# Altium PCB LMS.PcbDoc
Units mm, origin at the board's own origin, x right, y up, seen from the top; angles counter-clockwise.
Board outline 38 x 48 mm, 2 copper layers (Top Layer, Bottom Layer); 29 components, 25 nets, 119 pads, 27 vias.
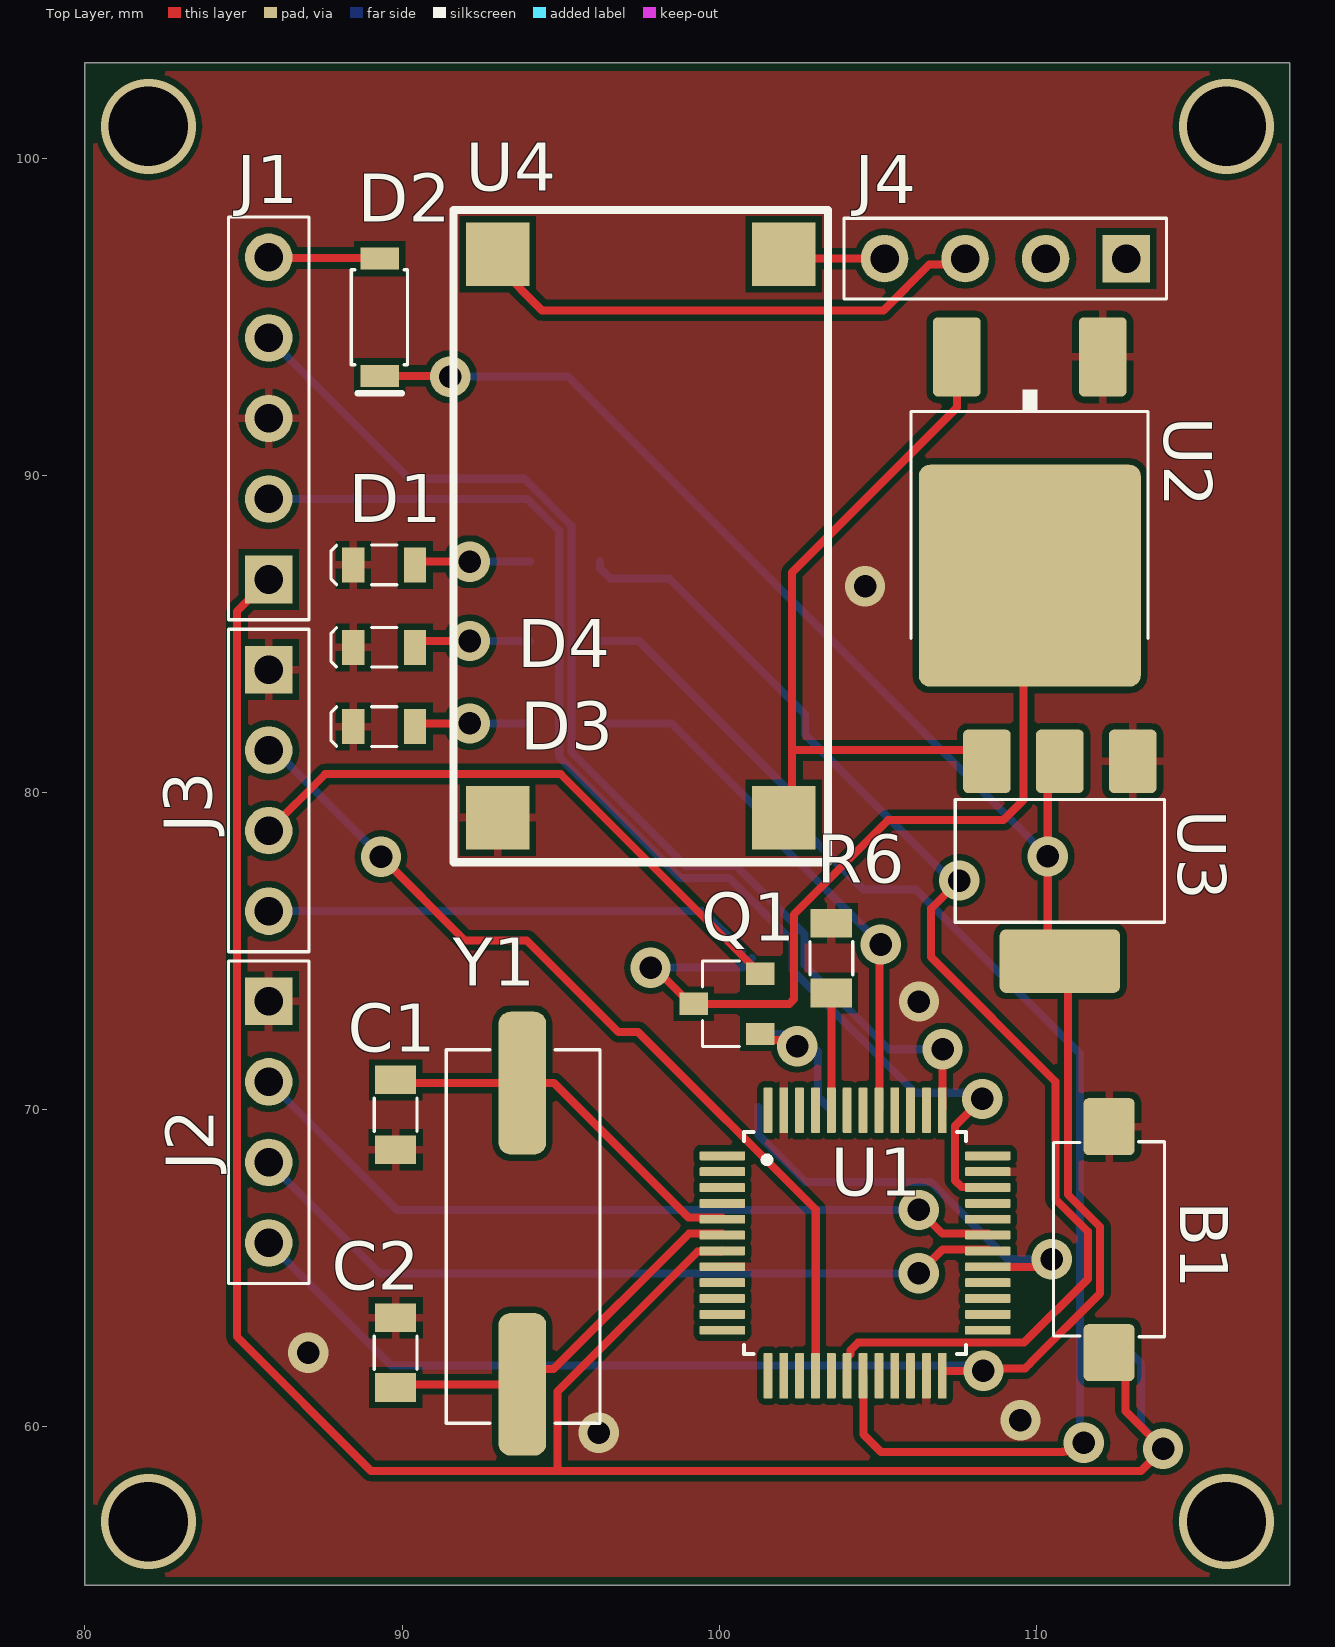
[diagram p0: Top Layer view]
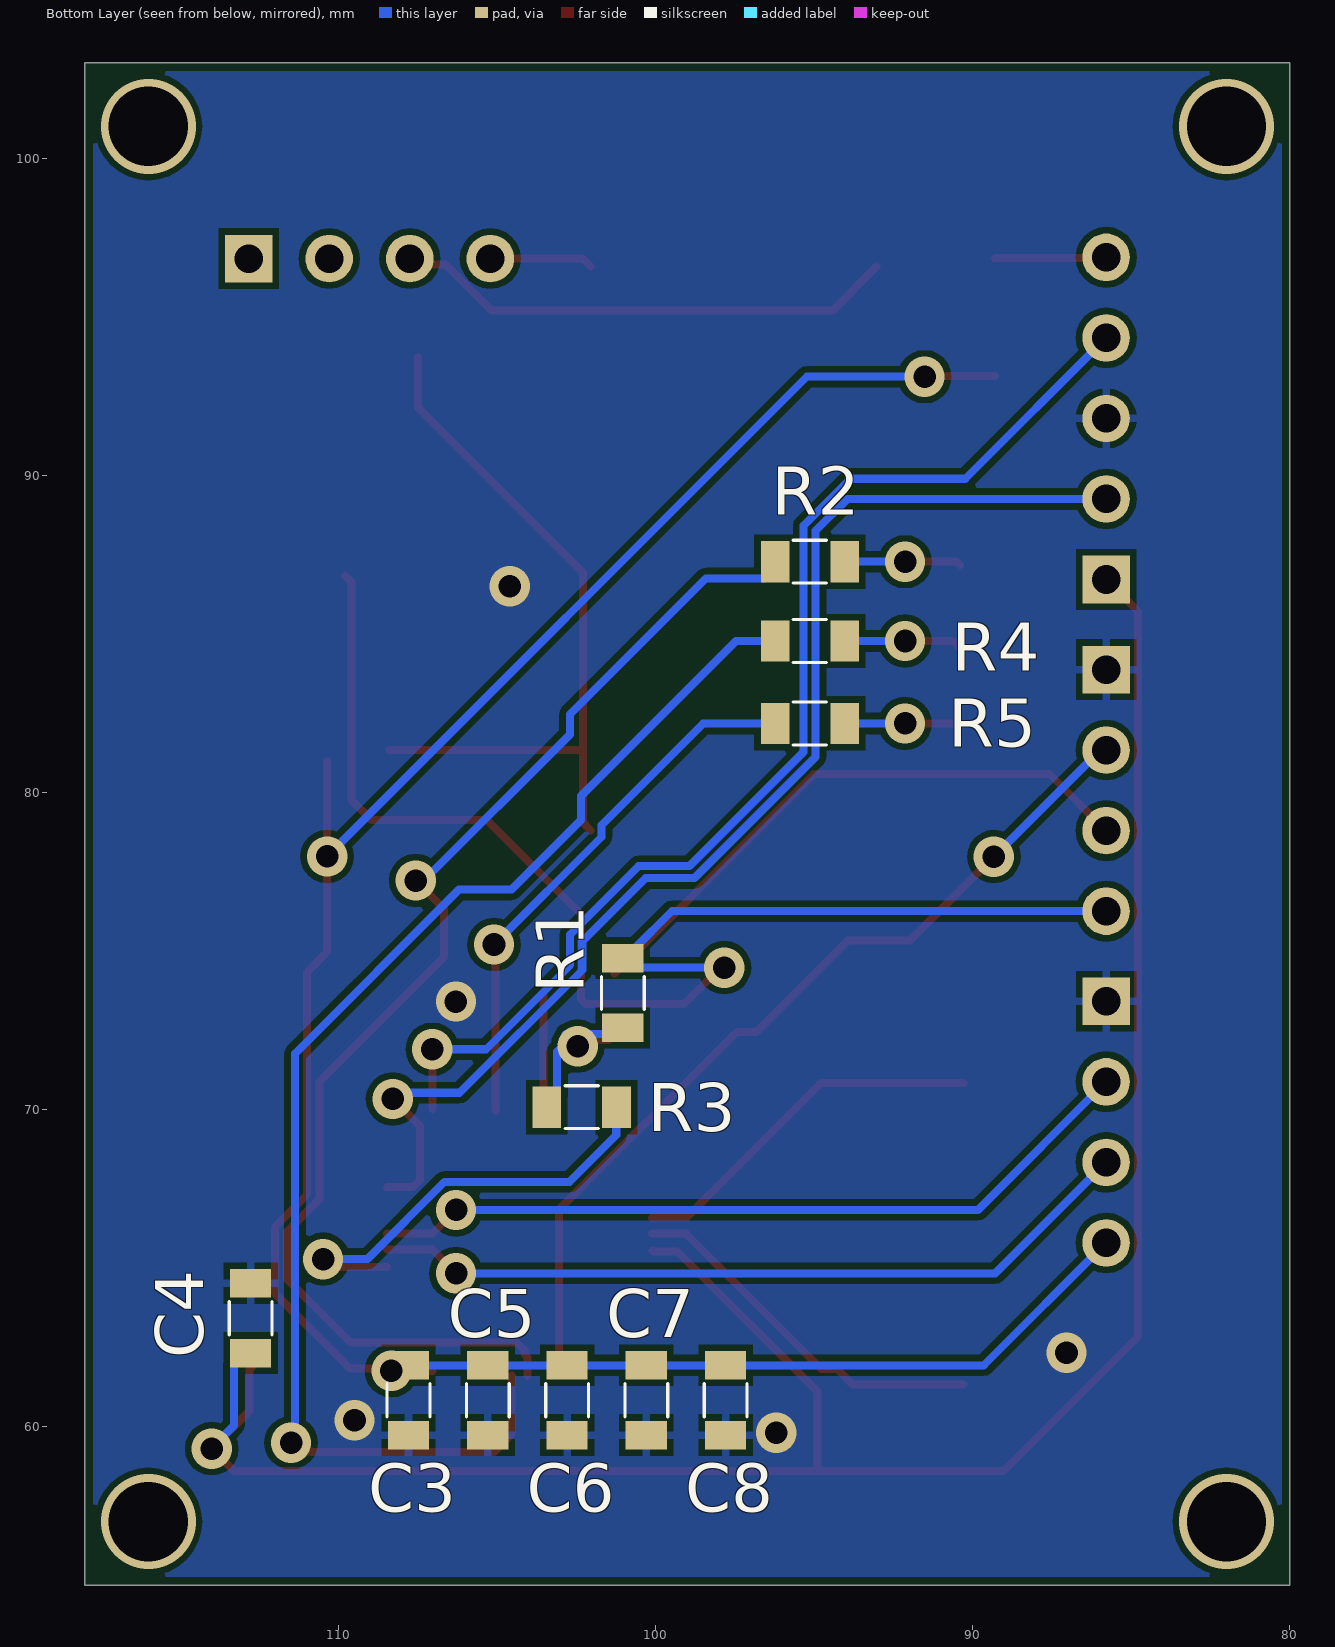
[diagram p1: Bottom Layer view, seen from below]
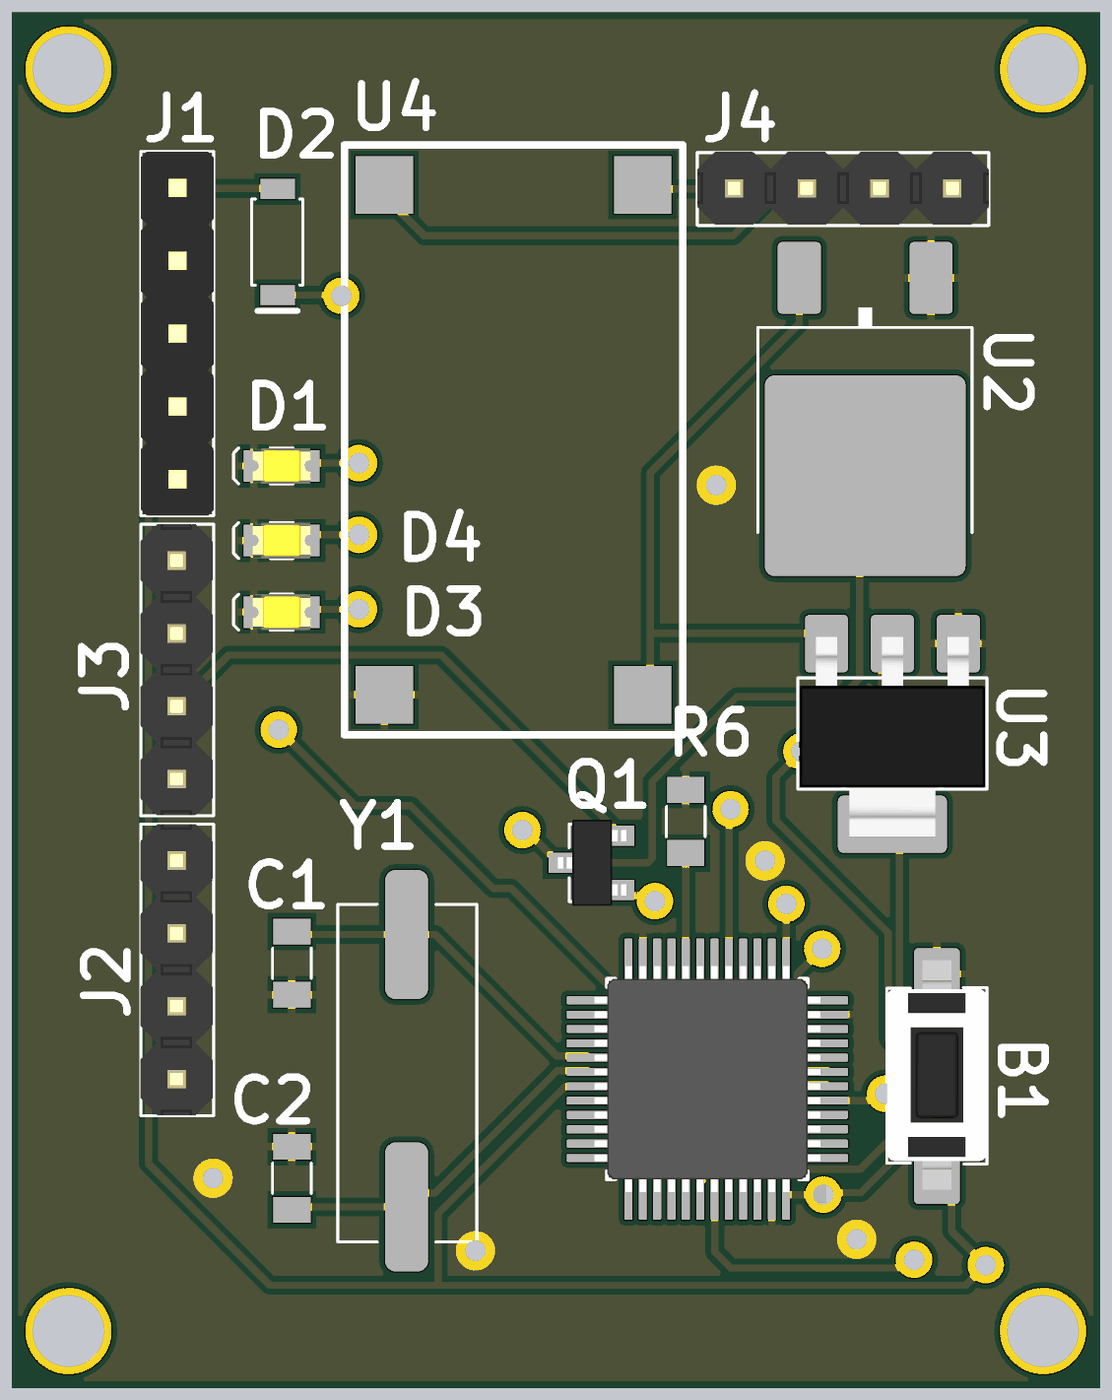
[diagram p2: 3D render of the assembled board from above, using the file's embedded part models]

## Layer stack, top to bottom
Top Solder: solder mask 0.0102, Solder Resist, Dk 3.5
Top Layer: signal copper 0.0356
Dielectric 1: dielectric 0.32, FR-4, Dk 4.8
Bottom Layer: signal copper 0.0356
Bottom Solder: solder mask 0.0102, Solder Resist, Dk 3.5

## Board outline
80,55 80,103 118,103 118,55

## Design rules (kind name [scope] priority, off if disabled: settings)
AcuteAngle [All] p1: minimum=3.50000000000000E+0001 checktracksonly=FALSE
BoardOutlineClearance "BoardOutlineClearance 1" [All] p1: gap=0.25 ignorepadtopadclearanceinfootprint=FALSE except(0: Arc-SplitContinuation Track-SplitContinuation SMDPad-SplitContinuation THPad-SplitContinuation Via-SplitContinuation Fill-SplitContinuation Poly-SplitContinuation Region-SplitContinuation Text-SplitContinuation) // Milling
Clearance "Clearance-1 1/2 Oz" [All] p1: gap=0.125 ignorepadtopadclearanceinfootprint=FALSE except(0.2: Arc-Fill Arc-Poly Track-Fill Track-Poly SMDPad-SMDPad SMDPad-Fill SMDPad-Poly THPad-Fill THPad-Poly Via-Fill Via-Poly Fill-Fill Fill-Poly Poly-Poly Poly-Region Poly-Text; 0.25: Arc-Hole Track-Hole SMDPad-Hole THPad-Hole Via-Hole Fill-Hole Poly-Hole Region-Hole Text-Hole) // Standart
ComponentClearance [All] p1: gap=0.1 collisioncheckmode=3 verticalgap=0.1 showdistances=FALSE
DiffPairsRouting "DiffPairsRouting 1/2 Oz" [All] p1: maxlimit=0.254 minlimit=0.125 mostfreqgap=0.254 toplayer_minwidth=0.125 toplayer_maxwidth=0.381 toplayer_prefwidth=0.381 bottomlayer_minwidth=0.125 bottomlayer_maxwidth=0.381 bottomlayer_prefwidth=0.381 maxuncoupledlength=12.7
HoleSize "Minimum HoleSize" [IsPad] p1: absolutevalues=TRUE maxlimit=5.9 minlimit=0.6 maxpercent=80.000 minpercent=20.000
HoleSize "Minimum HoleSize VIA 1" [IsVia] p2: absolutevalues=TRUE maxlimit=5.9 minlimit=0.3 maxpercent=80.000 minpercent=20.000 // Standart
HoleToHoleClearance Hole2HoleClearance [All] p1: gap=0.25 allowstackedmicrovias=FALSE
MinimumAnnularRing "Minimum AR VIA Standart" [All] p1: minimumring=0.15
MinimumAnnularRing "Minimum AR PAD Standart" [All] p2: minimumring=0.2
MinimumSolderMaskSliver "SolderMask Bridge Standart" [All] p1: minsoldermaskwidth=0.15 // All Masks
PlaneClearance "PlaneClearance-1 1/2 Oz" [All] p1: clearance=0.2 // Standart
PlaneConnect "TermalConnect-1 1/2 Oz" [All] p1: planeconnectstyle=Relief reliefexpansion=0.2 reliefentries=4 reliefconductorwidth=0.2 reliefairgap=0.2 // Standart
PolygonConnect "PolygonConnect-1 1/2 Oz" [All] p1: thpad.connectstyle=Relief thpad.reliefconductorwidth=0.254 thpad.reliefentries=4 thpad.polygonreliefangle="90 Angle" thpad.airgapwidth=0.2 smdpad.connectstyle=Relief smdpad.reliefconductorwidth=0.254 smdpad.reliefentries=4 smdpad.polygonreliefangle="90 Angle" smdpad.airgapwidth=0.2 via.connectstyle=Direct via.reliefconductorwidth=0.254 via.reliefentries=4 via.polygonreliefangle="90 Angle" via.airgapwidth=0.254 // Standart
RoutingCorners [All] p1 off: cornerstyle=45-Degree minsetback=2.54 maxsetback=2.54
RoutingVias [All] p1: holewidth=0.4 width=0.8 viastyle="Through Hole" minholewidth=0.3 minwidth=0.6 maxholewidth=5.9 maxwidth=8.9
SilkToSilkClearance Silk2SilkClearance [All] p1 off: silktosilkclearance=0.15
SilkToSolderMaskClearance Silk2SolderMaskClearance [IsPad] p1 off: minsilkscreentomaskgap=0.15 clearancetoexposedcopper=TRUE
SolderMaskExpansion SolderMaskExpansion-1 [All] p1: expansion=0.05 istentingtop=FALSE // Standart
UnRoutedNet [All] p1: checkbadconnections=TRUE
Width "Width 1/2 Oz" [All] p1: maxlimit=10 minlimit=0.125 preferedwidth=0.254 checkconnectedcopper=TRUE
19 further rules are at their usual default settings.

## Components (designator, comment, footprint, x,y, rotation, side; value= is the part's Value field where it differs from the comment)
B1 "But" "BUTTON 6x3.5" 112.296,69.455 r0 top
C1 "3.9pF" "0805 Capicator" 89.796,69.83 r90 top
C2 "3.9pF" "0805 Capicator" 89.796,62.33 r270 top
C3 "0.1uF" "0805 Capicator" 107.796,60.83 r90 bottom
C4 "0.1uF" "0805 Capicator" 112.776,63.416 r270 bottom
C5 "0.1uF" "0805 Capicator" 105.296,60.83 r90 bottom
C6 "0.1uF" "0805 Capicator" 102.796,60.83 r90 bottom
C7 "0.1uF" "0805 Capicator" 100.296,60.83 r90 bottom
C8 "4.7uF" "0805 Capicator" 97.796,60.83 r90 bottom
D1 "LedG" "0805 Led" 89.437,87.171 r180 top
D2 "Diode" sod-123 89.296,96.83 r270 top
D3 "LedY" "0805 Led" 89.437,84.571 r180 top
D4 "LedR" "0805 Led" 89.437,82.071 r180 top
J1 "PLS 5x1" "PLS 5x1" 85.796,86.71 r90 top
J2 "PLS 4x1" "PLS 4x1" 85.796,73.41 r270 top
J3 "PLS 4x1" "PLS 4x1" 85.796,83.87 r270 top
J4 "PLS 4x1" "PLS 4x1" 112.836,96.83 r180 top
Q1 "MOSFET-P" SOT-23 101.296,72.38 r90 top
R1 "10k" "0805 Resistor" 101.037,73.671 r90 bottom
R2 "300" "0805 Resistor" 95.137,87.271 r180 bottom
R3 "20" "0805 Resistor" 102.337,70.071 r0 bottom
R4 "300" "0805 Resistor" 95.137,84.771 r180 bottom
R5 "300" "0805 Resistor" 95.137,82.171 r180 bottom
R6 "3.9k" "0805 Resistor" 103.537,74.771 r270 top
U1 "STM32F103C6T6" STM32F103C6T6 104.287,65.786 r0 top
U2 "LDO 5V" TO-252 109.796,93.73 r180 top
U3 "LDO 3.3V" SOT-223 110.744,80.976 r180 top
U4 "DC-DC" DC-DC 97.782,89.224 r270 top
Y1 "8MHz" hc-49sm 93.796,61.33 r90 top

## Footprints (in the part's own frame and the unit in brackets; to place one, negate y for a bottom-side part, rotate by r counter-clockwise, add the part's x,y. Pads: shape width x height; smd on the part's side, far side on the other; paste and mask are expansions set on the pad)
"0805 Capicator" [mm]
  rect 0.9x1.3 smd: 1(-1.1,0) 2(1.1,0)
  silkscreen extent -0.53,-0.67 0.53,0.67, body extent -1.05,-0.67 1.05,0.68, height 0.75
"0805 Led" [mm]
  rect 0.7x1.1 smd: 1(-0.975,0) 2(0.975,0)
  silkscreen extent -0.4,-0.63 1.68,0.63, body extent -1.01,-0.62 1.01,0.62, height 1.1
"0805 Resistor" [mm]
  rect 0.9x1.3 smd: 1(-1.1,0) 2(1.1,0)
  silkscreen extent -0.53,-0.67 0.53,0.67, body extent -1.05,-0.67 1.05,0.68, height 0.6
"BUTTON 6x3.5" [mm]
  rrect20% 1.6x1.8 smd: 1(0,0) 2(0,-7.125)
  silkscreen extent -1.75,-6.63 1.75,-0.48, body extent -1.75,-7.52 1.75,0.48, height 4.3
DC-DC [mm]
  rect 2x2 smd: 1(-7.747,4.254) 2(-7.747,-4.763) 3(10.033,4.255) 4(10.033,-4.762)
  silkscreen extent -9.14,-6.16 11.43,5.65
hc-49sm [mm]
  rrect50% 4.5x1.5 smd: 1(0,0) 2(9.5,0)
  silkscreen extent -1.23,-2.45 10.55,2.4, body extent -1.7,-2.44 11.1,2.39
"PLS 4x1" [mm] "Connector; Header; 5 Position"
  rect 1.5x1.5 hole 0.9: 1(0,0)
  round 1.5 hole 0.9: 2(2.54,0) 3(5.08,0) 4(7.62,0)
  silkscreen extent -1.27,-1.27 8.9,1.27, body extent -1.27,-1.3 8.89,1.24, height 8.6
"PLS 5x1" [mm] "Connector; Header; 5 Position"
  rect 1.5x1.5 hole 0.9: 1(0,0)
  round 1.5 hole 0.9: 2(2.54,0) 3(5.08,0) 4(7.62,0) 5(10.16,0)
  silkscreen extent -1.27,-1.27 11.43,1.27, body extent -1.28,-1.28 11.42,1.26, height 8.54
sod-123 [mm]
  rect 0.7x1.2 smd: 1(0,0) 2(3.7,0)
  silkscreen extent 0.35,-0.9 4.25,0.87, body extent 0,-0.8 3.7,0.8
SOT-23 [mm]
  rect 0.7x0.9 smd: 1(0,0) 2(1.9,0) 3(0.95,2.1)
  silkscreen extent -0.4,0.65 2.3,1.83, body extent -0.55,-0.17 2.45,2.23, height 1.1
SOT-223 [mm]
  rrect20% 1.5x2 smd: 1(-2.3,0) 2(0,0) 3(2.3,0)
  rrect20% 3.8x2 smd: 2(0,6.3)
  silkscreen extent -3.3,1.2 3.3,5.07, body extent -3.25,-0.23 3.25,6.73, height 1.7
STM32F103C6T6 [mm]
  rrect25% 1.44x0.28 smd: 1(-4.185,2.75) 2(-4.185,2.25) 3(-4.185,1.75) 4(-4.185,1.25) 5(-4.185,0.75) 6(-4.185,0.25) 7(-4.185,-0.25) 8(-4.185,-0.75) 9(-4.185,-1.25) 10(-4.185,-1.75) 11(-4.185,-2.25) 12(-4.185,-2.75) 25(4.185,-2.75) 26(4.185,-2.25) 27(4.185,-1.75) 28(4.185,-1.25) 29(4.185,-0.75) 30(4.185,-0.25) 31(4.185,0.25) 32(4.185,0.75) 33(4.185,1.25) 34(4.185,1.75) 35(4.185,2.25) 36(4.185,2.75)
  rrect25% 0.28x1.44 smd: 13(-2.75,-4.185) 14(-2.25,-4.185) 15(-1.75,-4.185) 16(-1.25,-4.185) 17(-0.75,-4.185) 18(-0.25,-4.185) 19(0.25,-4.185) 20(0.75,-4.185) 21(1.25,-4.185) 22(1.75,-4.185) 23(2.25,-4.185) 24(2.75,-4.185) 37(2.75,4.185) 38(2.25,4.185) 39(1.75,4.185) 40(1.25,4.185) 41(0.75,4.185) 42(0.25,4.185) 43(-0.25,4.185) 44(-0.75,4.185) 45(-1.25,4.185) 46(-1.75,4.185) 47(-2.25,4.185) 48(-2.75,4.185)
  silkscreen extent -3.5,-3.5 3.5,3.5, body extent -4.5,-4.5 4.5,4.5, height 0.72
TO-252 [mm]
  rrect20% 1.5x2.5 smd: 1(-2.3,0) 3(2.3,0)
  rrect10% 7x7 smd: 2(0,6.9)
  silkscreen extent -3.72,1.02 3.75,8.87, body extent -3.38,-0.65 3.35,9.45, height 2.37

## Part data
B1: library part Button, "Button 2 Conn SMD"
C1 C2: library part "Cap 39pF"
C3 C4 C5 C6 C7: library part "Cap 0.1uF"
C8: library part "Cap 4.7uF"
D1: library part "Led Green"
D2: library part "Diode Schottky", "0.5 A, Low Forward Voltage less than 385 mV, 400 mW Power Dissipation Package"
D3: library part "Led Yellow"
D4: library part "Led Red"
J1: library part "Conn 5", "Header, 5-Pin"
J2 J3 J4: library part "Conn 4", "Header, 4-Pin"
Q1: "P-Channel Power MOSFET 12V to 20V, Infineon"
R1: library part "Res 10k"
R2 R4 R5: library part "Res 300"
R3: library part "Res 20"
R6: library part "Res 3.9k"
U2: "LDO Regulator Pos 5V 1A"
U3: "LDO Regulator Pos 3.3V 1.3A 4-Pin(3+Tab) SOT-223 T/R"
Y1: library part "Crystal 8MHz", "Crystal. HC-49SM (US)"

## Via types
v1: diameter 1.27, hole 0.711, Top Layer to Bottom Layer, 23 vias
v2: diameter 3, hole 2.5, Top Layer to Bottom Layer, 4 vias

## Nets (pads, with @x,y where several pads share a name; then routed paths per layer and width w, separated by ;. In a path a pad name is that pad's centre, name@x,y a point inside that pad or via, vN(x,y) a via of type N, cw(c..) or ccw(c..) an arc to the next point about the centre after c; other vN are vias at no path point)
+3.3V: C3.2 C5.2 C6.2 C7.2 C8.2 D2.2 J2.4 U1.24 U3.2 | length 75
  Top Layer w0.254: D2.2 91.496,93.13 v1@91.546,93.08 ; U1.24@107.046,61.753 107.05,61.757 v1(108.335,61.757) 108.408,61.83 109.647,61.83 109.796,61.979 109.796,61.987 112.008,64.199 112.008,66.3 110.998,67.31 110.998,74.326 110.363,74.961 v1(110.363,77.978) U3.2@110.363,80.984
  Bottom Layer w0.254: J2.4 89.656,61.93 C8.2 C7.2 C6.2 C5.2 108.162,61.93 v1(108.335,61.757) ; v1(91.521,93.105) 95.236,93.105 v1(110.363,77.978)
+5V: J3.4 Q1.3 R1.2 U2.2 | length 42.1
  Top Layer w0.254: J3.4 J3.4@85.898,76.148 ; v1@98.196,74.23 Q1.3@99.096,73.33 ; Q1.3 102.213,73.33 102.362,73.479 102.362,76.152 105.331,79.121 108.966,79.121 109.601,79.756 109.601,86.635 U2.2
  Bottom Layer w0.254: J3.4 99.494,76.25 100.716,75.028 R1.2@100.716,74.93 ; v1(97.837,74.471) 100.737,74.471 R1.2
+7.4V: U2.3 U3.3 U4.3 | length 23.3
  Top Layer w0.254: U4.3@102.05,78.797 102.296,79.043 102.296,81.33 ; U2.3 107.496,92.13 102.296,86.93 102.296,81.33 ; U3.3@108.398,81.33 102.296,81.33
+12V: J4.4 U4.1 | length 3.3
  Top Layer w0.254: U4.1@102.05,96.577 102.304,96.83 J4.4
GND: B1.1 C1.1 C2.1 C3.1 C4.1 C5.1 C6.1 C7.1 C8.1 D1.2 D3.2 D4.2 J1.3 J2.1 J3.1 R6.1 U1.8 U1.23 U1.35 U1.47 U2.1 U3.1 U4.4
  other v1: 96.2,59.8 109.5,60.2 87.046,62.33 106.3,73.4 104.6,86.5
GND12: J4.3 U4.2 | length 16
  Top Layer w0.254: U4.2@93.033,96.577 94.414,95.196 105.181,95.196 106.625,96.64 107.566,96.64 J4.3
NetC1_2: C1.2 U1.5 Y1.2 | length 11.6
  Top Layer w0.254: C1.2@90.296,70.83 94.796,70.83 99.033,66.593 100.098,66.593 U1.5@100.111,66.58
NetC2_2: C2.2 U1.6 Y1.1 | length 11.8
  Top Layer w0.254: C2.2@90.296,61.33 Y1.1 94.278,61.812 94.778,61.812 99.046,66.08 U1.6@100.111,66.08
NetD1_1: D1.1 R2.2 | length 3.7
  Top Layer w0.254: D1.1 90.512,87.271 v1(92.137,87.271)
  Bottom Layer w0.254: v1(92.137,87.271) R2.2
NetD2_1: D2.1 J1.5 | length 3.5
  Top Layer w0.254: J1.5 85.816,96.85 89.276,96.85 D2.1
NetD3_1: D3.1 R4.2 | length 3.7
  Top Layer w0.254: D3.1 90.612,84.771 v1(92.137,84.771)
  Bottom Layer w0.254: v1(92.137,84.771) R4.2
NetD4_1: D4.1 R5.2 | length 3.7
  Top Layer w0.254: D4.1 90.512,82.171 v1(92.137,82.171)
  Bottom Layer w0.254: v1(92.137,82.171) R5.2
NetQ1_1: Q1.1 R1.1 R3.2 | length 6.1
  Top Layer w0.254: Q1.1 101.489,72.187 102.267,72.187 v1(102.46,71.994)
  Bottom Layer w0.254: R1.1 101.237,72.371 v1@102.46,72.371 ; v1(102.46,71.994) v1@102.46,72.371 ; R3.2 103.114,70.394 103.114,71.819 102.837,72.096 102.837,72.371 v1@102.46,72.371
NetR2_1: R2.1 U1.18 | length 40.2
  Top Layer w0.254: U1.18 104.037,62.181 104.145,62.289 104.145,62.405 104.384,62.644 109.616,62.644 111.629,64.657 111.629,66.143 110.6,67.172 110.6,70.883 106.682,74.801 106.682,76.329 v1(107.569,77.216)
  Bottom Layer w0.254: R2.1 96.237,87.071 96.56,86.748 98.418,86.748 102.706,82.46 102.706,81.825 107.315,77.216 v1(107.569,77.216)
NetR4_1: R4.1 U1.19 | length 42.5
  Top Layer w0.254: U1.19 104.55,61.588 104.55,59.75 105.1,59.2 110.843,59.2 110.849,59.206 110.944,59.206 111.225,59.487 v1(111.5,59.487)
  Bottom Layer w0.254: R4.1 97.474,84.771 102.361,79.884 102.361,79.122 104.55,76.933 106.201,76.933 111.377,71.757 111.377,59.61 v1(111.5,59.487)
NetR5_1: R5.1 U1.41 | length 17.2
  Top Layer w0.254: U1.41 105.05,69.984 105.05,75.15 v1(105.1,75.2)
  Bottom Layer w0.254: R5.1 98.503,82.171 101.704,78.97 101.704,78.596 v1(105.1,75.2)
NetR6_2: R6.2 U1.44 | length 3.7
  Top Layer w0.254: U1.44 R6.2
NRST: B1.2 C4.2 J1.1 U1.7 | length 72.5
  Top Layer w0.254: J1.1 84.794,85.708 84.794,62.832 89.026,58.6 94.9,58.6 ; U1.7@100.098,65.549 100.072,65.523 99.323,65.523 94.9,61.1 94.9,58.6 ; B1.2 112.809,61.817 112.809,60.491 v1(114,59.3) 113.3,58.6 94.9,58.6
  Bottom Layer w0.254: C4.2 112.976,62.316 113.299,61.993 113.299,60.036 114,59.335 v1(114,59.3)
servo_contorl: R3.1 U1.29 | length 13.9
  Top Layer w0.254: U1.29 109.973,65.036 110.215,65.278 v1(110.49,65.278)
  Bottom Layer w0.254: R3.1 101.245,70.063 101.245,69.189 102.717,67.717 106.663,67.717 109.093,65.287 110.481,65.287 v1(110.49,65.278)
servo_contorl_PDM: J3.3 Q1.2 | length 18.8
  Top Layer w0.254: J3.3 87.577,80.571 95.005,80.571 Q1.2
servo_feedback: J3.2 U1.16 | length 28.4
  Top Layer w0.254: v1(89.337,77.971) 91.978,75.33 93.933,75.33 96.82,72.443 97.444,72.443 103.046,66.841 U1.16@103.046,61.645
  Bottom Layer w0.254: J3.2 85.978,81.33 v1(89.337,77.971)
SWCLK: J1.4 U1.37 | length 37.2
  Top Layer w0.254: U1.37@107.046,70.015 v1(107.046,71.897)
  Bottom Layer w0.254: J1.4 90.239,89.887 93.857,89.887 95.337,88.407 95.337,81.271 98.937,77.671 100.537,77.671 102.697,75.511 102.697,74.547 105.347,71.897 v1(107.046,71.897)
SWDIO: J1.2 U1.34 | length 39.1
  Top Layer w0.254: v1(108.296,70.33) 107.438,69.472 107.438,67.762 107.651,67.549 108.459,67.549 U1.34
  Bottom Layer w0.254: J1.2 93.958,89.25 94.958,88.25 94.958,81.114 98.78,77.292 100.316,77.292 102.318,75.29 102.318,74.39 106.184,70.524 108.102,70.524 v1(108.296,70.33)
USART_to_Rasp_RX: J2.2 U1.31 | length 24.7
  Top Layer w0.254: v1(106.296,66.83) 107.046,66.08 U1.31@108.481,66.08
  Bottom Layer w0.254: J2.2 89.836,66.83 v1(106.296,66.83)
USART_to_Rasp_TX: J2.3 U1.30 | length 24.4
  Top Layer w0.254: v1(106.296,64.83) 107.046,65.58 U1.30@108.481,65.58
  Bottom Layer w0.254: J2.3 89.296,64.83 v1(106.296,64.83)
pads on no net: J4.1 J4.2 U1.1 U1.2 U1.3 U1.4 U1.9 U1.10 U1.11 U1.12 U1.13 U1.14 U1.15 U1.17 U1.20 U1.21 U1.22 U1.25 U1.26 U1.27 U1.28 U1.32 U1.33 U1.36 U1.38 U1.39 U1.40 U1.42 U1.43 U1.45 U1.46 U1.48
copper on no net:
  other v2: 82,57 116,57 82,101 116,101

## Polygon pours and split planes (outlines as drawn)
GND on Top Layer "GND_poly_upper" (solid, remove dead copper, pour order 0): 25.4,25.4 177.8,25.4 177.8,127 25.4,127
GND on Bottom Layer "GND_poly_lower" (solid, remove dead copper, pour order 1): 25.4,25.4 177.8,25.4 177.8,127 25.4,127